# Altium PCB led_RGB_PCB.PcbDoc
Units mil, origin at the board's own origin, x right, y up, seen from the top; angles counter-clockwise.
Board outline 3149.61 x 1377.95 mil, 2 copper layers (Top Layer, Bottom Layer); 35 components, 26 nets, 113 pads, 82 vias.
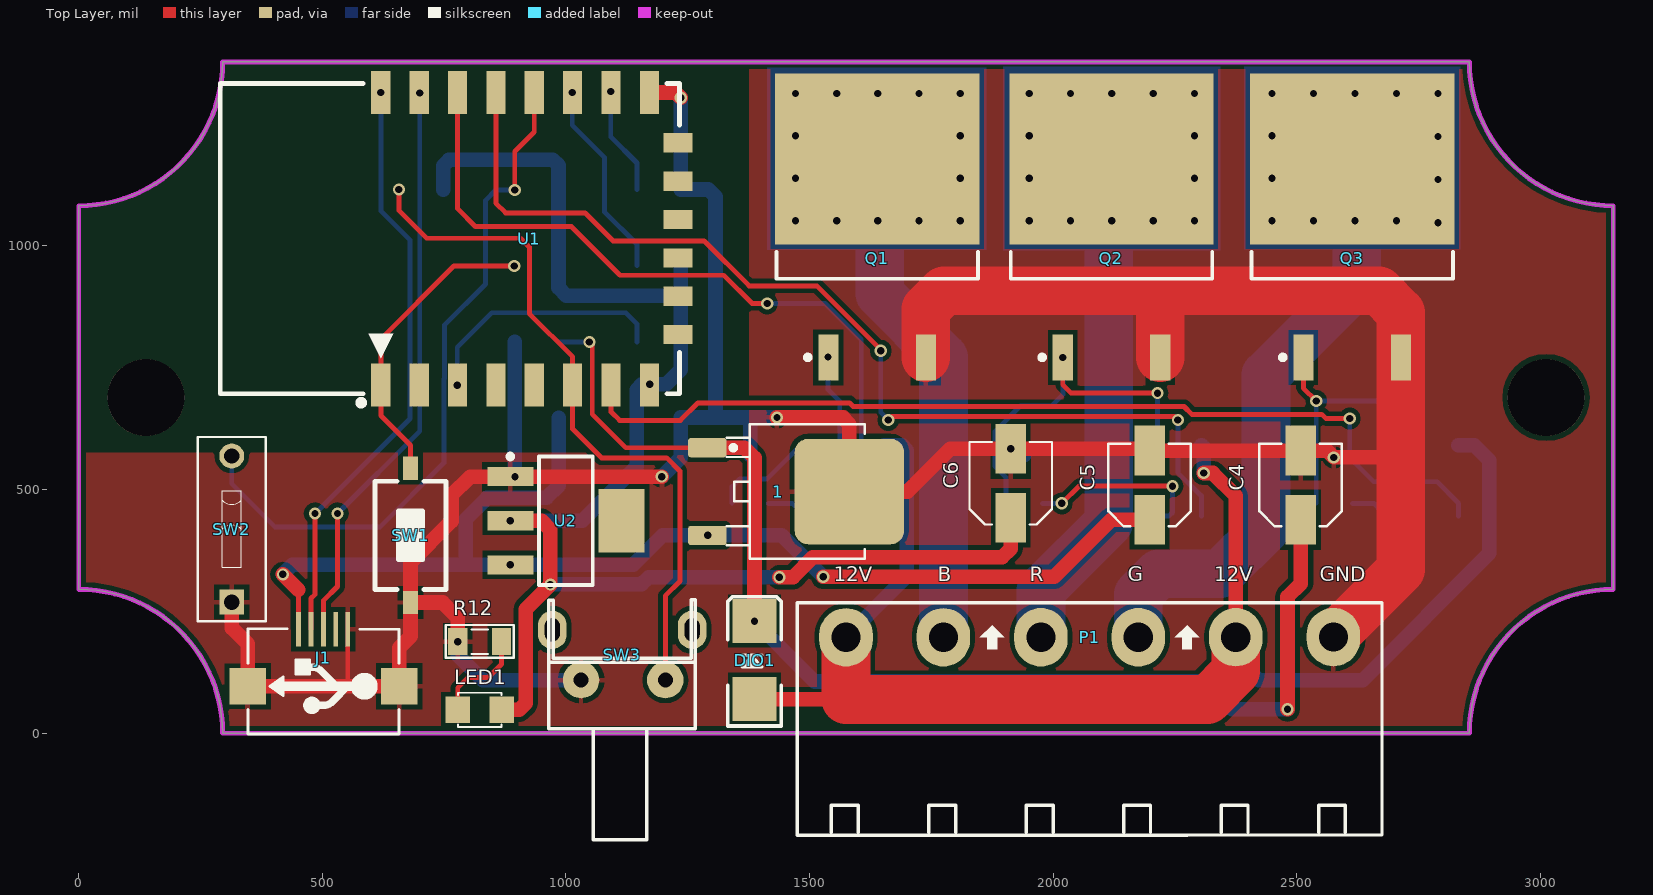
[diagram p0: Top Layer view]
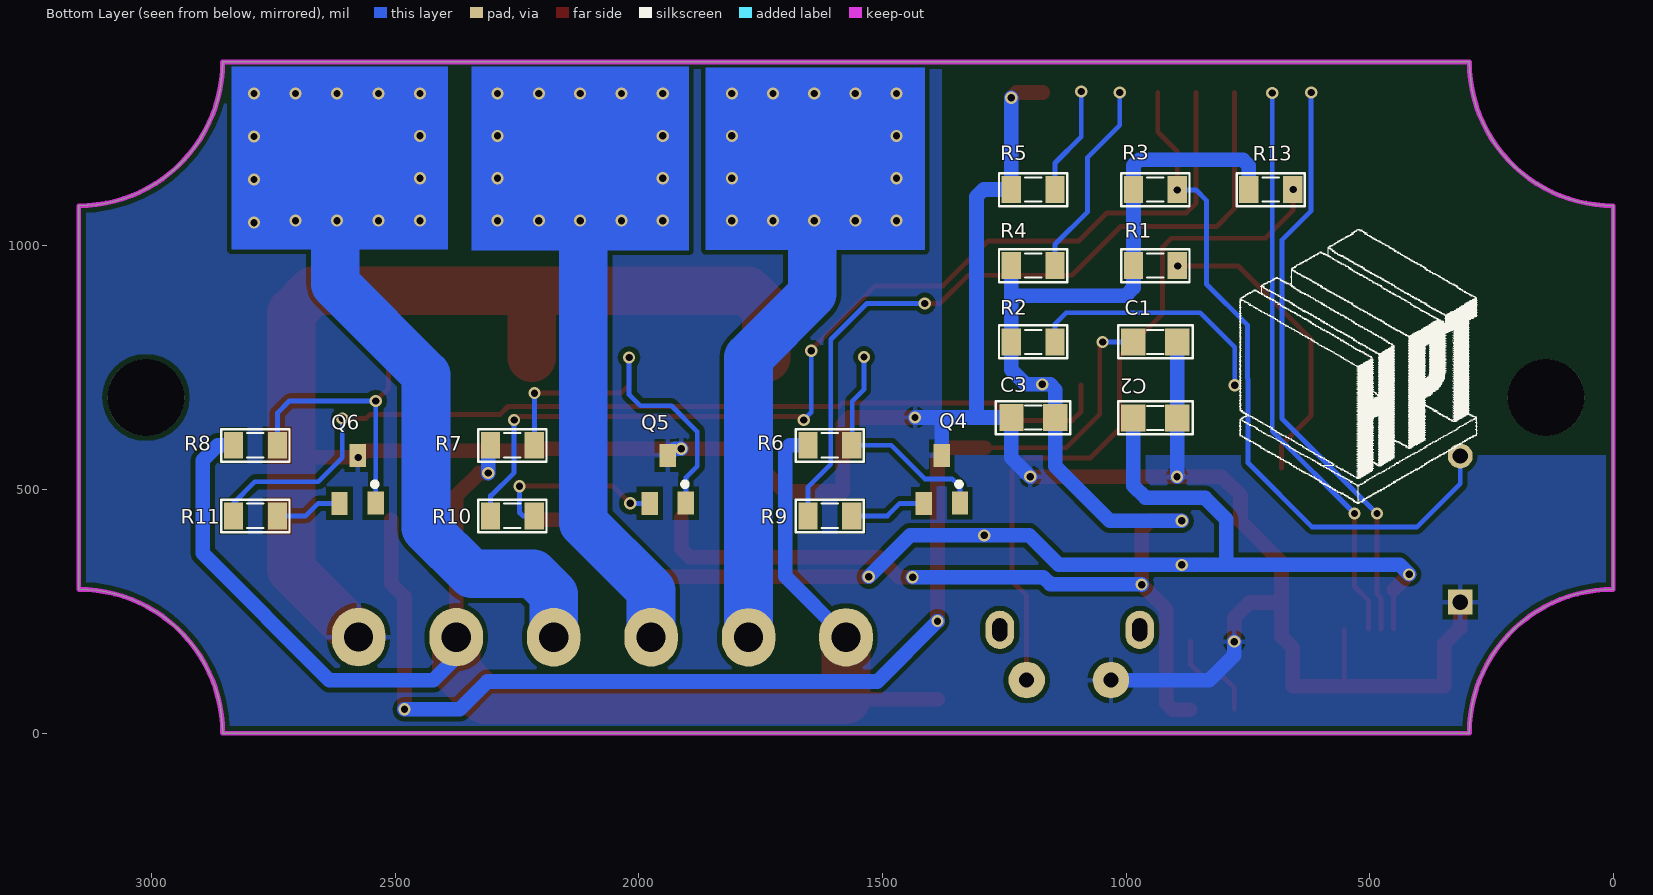
[diagram p1: Bottom Layer view, seen from below]

## Layer stack, top to bottom
Top Solder: solder mask 0.4, Solder Resist, Dk 3.5
Top Layer: signal copper 1.4
Dielectric 1: dielectric 12.6, FR-4, Dk 4.8
Bottom Layer: signal copper 1.4
Bottom Solder: solder mask 0.4, Solder Resist, Dk 3.5

## Board outline
295.27,0 ccw(c0,0) 0,295.28 0,1082.68 ccw(c0,1377.95) 295.27,1377.95 2854.33,1377.95 ccw(c3149.6,1377.95) 3149.6,1082.68 3149.6,295.28 ccw(c3149.6,0) 2854.33,0

## Design rules (kind name [scope] priority, off if disabled: settings)
Clearance [All] p1: gap=10
PolygonConnect [All] p1: connectstyle=Relief reliefconductorwidth=10 reliefentries=4 polygonreliefangle="90 Angle" airgapwidth=10
RoomDefinition led_RGB_schematic [InComponentClass('led_RGB_schematic')] p1: confinementstyle=ConfineIn formatcopy=TRUE lockcomponents=FALSE outline 3356,25 13381,25 13381,1130 3356,1130
RoutingVias [All] p1: holewidth=15 width=25 viastyle="Through Hole" minholewidth=15 minwidth=25 maxholewidth=28 maxwidth=50
SolderMaskExpansion [All] p1: expansion=4
Width Width_1 [InNet('5V')] p1: maxlimit=50 minlimit=10 preferedwidth=50
Width [All] p2: maxlimit=100 minlimit=8 preferedwidth=10
30 further rules are at their usual default settings.

## Components (designator, comment, footprint, x,y, rotation, side; value= is the part's Value field where it differs from the comment)
1 "LM78xx" TO252-123 1436,496 r270 top
C1 "104" SM-CAP-0805 895.22,803 r0 bottom
C2 "104" SM-CAP-0805 895.22,647 r0 bottom
C3 "104" SM-CAP-0805 1235.22,648 r180 bottom
C4 "CN-ALU-SMD" CAP-ALU-SMD-4.5x5x1.4 2508,509 r90 top
C5 "CN-ALU-SMD" CAP-ALU-SMD-4.5x5x1.4 2198,509 r90 top
C6 "CN-ALU-SMD" CAP-ALU-SMD-4.5x5x1.4 1913,513 r90 top
DIO1 "Diode SMD" DIO-SMD-106 1387,150 r270 top
J1 "USB-5" USB-M1 502,213.29 r180 top
LED1 "LED" LED-0805-Blue 868,48 r180 top
P1 "Header 6" HED6T 1574.8,196.85 r0 top
Q1 "IRF540S" D2PAK_N 1638.72,1039 r90 top
Q2 "IRF540S" D2PAK_N 2119.72,1039 r90 top
Q3 "IRF540S" D2PAK_N 2613.72,1039 r90 top
Q4 "A1015" SOT23B 1378,521 r180 bottom
Q5 "A1015" SOT23B 1940.5,521 r180 bottom
Q6 "A1015" SOT23B 2577,521 r180 bottom
R1 "10K" RES-SMD-0805 939.72,960 r180 bottom
R2 "1K" RES-SMD-0805 1190.72,803 r0 bottom
R3 "10K" RES-SMD-0805 939.72,1116 r180 bottom
R4 "10K" RES-SMD-0805 1190.72,960 r180 bottom
R5 "10K" RES-SMD-0805 1190.72,1116 r180 bottom
R6 "10K" RES-SMD-0805 1608,591 r180 bottom
R7 "10K" RES-SMD-0805 2259.5,591 r180 bottom
R8 "10K" RES-SMD-0805 2787,591 r180 bottom
R9 "1K" RES-SMD-0805 1608,446 r180 bottom
R10 "1K" RES-SMD-0805 2259.5,446 r180 bottom
R11 "1K" RES-SMD-0805 2787,446 r180 bottom
R12 "4K7" RES-SMD-0805 823,188 r180 top
R13 "Res" RES-SMD-0805 703,1116 r180 bottom
SW1 "SW" SW1-SMD 681,406 r90 top
SW2 "SW" SW-DIP1-1 314,419 r0 top
SW3 "SW" SW2-D2 1115,109 r0 top
U1 "ESP_12_E" ESP_12_E 620,700 r90 top
U2 "LM1117-3.3V" SOT223 1000,436 r270 top

## Footprints (in the part's own frame and the unit in brackets; to place one, negate y for a bottom-side part, rotate by r counter-clockwise, add the part's x,y. Pads: shape width x height; smd on the part's side, far side on the other; paste and mask are expansions set on the pad)
CAP-ALU-SMD-4.5x5x1.4 [mm]
  rect 2.6x1.6 smd: 1(-1.8,0) 2(1.8,0)
  silkscreen extent -2.15,-2.15 2.15,2.15, body extent -2.5,-2.15 2.5,2.15, height 5.45
D2PAK_N [mm] "D2-PAK, 4-Leads, Body 8.8x10.4mm, Pitch 2.54mm, Lead Span 15.1mm, IPC Medium Density"
  rect 2.4x1.05 smd: 1(-6.8,2.54) 3(-6.8,-2.54)
  rect 8.9x10.65 smd: 2(3.55,0)
  silkscreen extent -6.92,-5.25 -1.3,5.25, body extent -2.7,-5.28 6.3,5.28, height 4.69
DIO-SMD-106 [mil]
  rect 90x90.55 smd: 1(80,0) 2(-80,0)
  silkscreen extent -130,-55 135,55, body extent -99,-50 106,52, height 95
ESP_12_E [mm] "ESP-12 Wi-Fi Module by AI-Thinker"
  rect 2.25x1 smd: 1(0.375,0) 2(0.375,-2) 3(0.375,-4) 4(0.375,-6) 5(0.375,-8) 6(0.375,-10) 7(0.375,-12) 8(0.375,-14) 15(15.625,-14) 16(15.625,-12) 17(15.625,-10) 18(15.625,-8) 19(15.625,-6) 20(15.625,-4) 21(15.625,-2) 22(15.625,0)
  rect 1x1.5 smd: 9(3,-15.5) 10(5,-15.5) 11(7,-15.5) 12(9,-15.5) 13(11,-15.5) 14(13,-15.5)
  silkscreen extent -0.7,-15.57 16.08,8.37, body extent 0,-15.49 16,8.51, height 2.75
HED6T [mil] "Header 4, 4 pin, hight 300mil, Pin to Pin 200, Colour Green"
  oval 110x120 hole 60: 1(0,0) 2(200,0) 3(400.06,0.06) 4(600.06,0.06) 5(800.12,0.12) 6(1000.46,0.46)
  silkscreen extent -100,-406 1100,71, body extent -100,-406 1094,66, height 334
LED-0805-Blue [mil]
  rect 50x55 smd: 1(0,0) 2(90,0)
  silkscreen extent 0,-35 90,35, body extent 5,-25 85,25, height 43
RES-SMD-0805 [mil]
  rect 39.37x55 smd: 1(-45,0) 2(45,0)
  silkscreen extent -70,-34 70,33, body extent -39,-25 39,25, height 31
SM-CAP-0805 [mil]
  rect 50x55 smd: 1(0,0) 2(90,0)
  silkscreen extent -32,-34 121,33, body extent 6,-25 84,25, height 31
SOT23B [mm] "SOT 23B"
  rect 0.85x1.2 smd: 1(0.94,-1.245) 2(0,1.25) 3(-0.95,-1.25)
  silkscreen extent 0.77,-0.38 1.02,-0.13, body extent -1.5,-1.3 1.5,1.2, height 1.06
SOT223 [mm]
  rect 1x2.4 smd: 1(-2.3,-2.9) 2(0,-2.9) 3(2.3,-2.9)
  rect 3.3x2.4 smd: 4(0,2.9)
  silkscreen extent -3.47,-3.02 3.35,1.4, body extent -3.25,-3.56 3.25,3.4, height 1.68
SW1-SMD [mm]
  rect 1.2x0.8 smd: 1(-3.5,0) 2(3.5,0)
  silkscreen extent -2.82,-1.85 2.82,1.85, body extent -3.05,-1.85 3.05,1.85, height 2.5
SW2-D2 [mil] "SW button 2pin, 300x 300 x 250 mil"
  round 75 hole 31: 1(-84,0) 2(89,0)
  oval 59.06x78.74 hole 31 slot 47.24 at 90 deg: G1(-143,103) G2(144,103)
  silkscreen extent -150,-328 150,165, body extent -163,-327 167,163, height 290
SW-DIP1-1 [mm] "01p, 2.54mm Pitch, Horizontal, Box Type, THT, flat Actuator, red, without Tape, Tube"
  rect 1.3x1.3 hole 0.8: 1(0,-3.81)
  round 1.3 hole 0.8: 2(0,3.81)
  silkscreen extent -1.77,-4.8 1.77,4.8, body extent -1.77,-4.8 1.77,4.8, height 5.4
TO252-123 [mm]
  round 0.5 on Mech15: 0(0,0)
  rrect25% 1x2 smd: 1(-2.285,-3.7) 3(2.285,-3.7)
  rrect25% 5.5x5.7 smd: 2(0,3.7)
  silkscreen extent -3.5,-2.7 3.5,4.5, body extent -3.3,-3.95 3.3,5.76, height 2.31
USB-M1 [mil]
  rect 10x70 smd: 1(51.18,0) 2(25.59,0) 3(0,0) 4(-25.59,0) 5(-50,0)
  rect 74.8x74.8 smd: 5(-155.51,116.84) 5(155.51,116.84)
  silkscreen extent -155,-1 155,215, body extent -157,5 158,218, height 107

## Part data
1: "Positive Voltage Regulator"
C1 C2 C3: library part CN
C4 C5 C6: "Polarized Capacitor (Axial)"
DIO1: "Default Diode"
LED1: library part "LED SMD"
P1: "Header, 6-Pin"
Q1 Q2 Q3: "HEXFET N-Channel Power MOSFET"
Q4 Q5 Q6: "PNP 600mW, ECB"
R1 R2 R3 R4 R5 R6 R7 R8 R9 R10 R11 R12 R13: library part Res-SMD, "Resistor"
SW1 SW2 SW3: library part SW2, "Switch button 2 pin"
U1: "ESP-12 Wi-Fi Module by AI-Thinker"
U2: library part LM1117, "800mA Low-Dropout Linear Regulator"

## Free pads (board coordinates)
  round 157.48 hole 157.48: 40(137.8,688.98) 41(3011.81,688.98)

## Via types
v1: diameter 25, hole 15, Top Layer to Bottom Layer, tented both sides, 82 vias

## Nets (pads, with @x,y where several pads share a name; then routed paths per layer and width w, separated by ;. In a path a pad name is that pad's centre, name@x,y a point inside that pad or via, vN(x,y) a via of type N, cw(c..) or ccw(c..) an arc to the next point about the centre after c; other vN are vias at no path point)
3.3V: C3.2 C6.1 LED1.1 R1.1 R2.2 R3.1 R4.1 R13.1 U1.8 U2.2 | length 3150.6
  Top Layer w30: LED1.1 904,48 917.47,61.47 917.47,254.47 v1(967.95,304.95) ; v1(885.83,436) 950,436 968,418 v1@968,305 ; v1(1438,320) 1466,320 1507,361 1895,361 1913,379 C6.1
  Bottom Layer w30: R13.1 748,1165 760,1177 973,1177 984.72,1165.28 R3.1 R1.1 984.72,914.28 1001,898 1235.72,898 ; v1(885.83,436) 1033,436 1145.22,548.22 C3.2 1145.22,705.22 1156,716 v1(1172,716) 1206,716 1235.72,745.72 R2.2 1235.72,898 ; v1(967.95,304.95) 967.45,305.45 1155.02,305.45 1169.57,320 v1(1438,320) ; R4.1 1235.72,898
5V: 1.3 C2.2 C5.1 J1.1 U2.3 | length 2474
  Top Layer w10: J1.1 450.82,294.18
  Top Layer w30: v1(419,326) 450.82,294.18 ; v1(1528,321) 2002,321 2119.13,438.13 C5.1
  Bottom Layer w30: v1(419,326) 438.45,345.45 794,345.45 ; C2.2 985.22,508.22 960,483 838,483 794,439 794,345.45 ; v1(1528,321) 1443,406 v1(1291,406) 1199,406 1138.45,345.45 v1(885.83,345.45) 794,345.45
12V: DIO1.1 P1.1 P1.5 R6.1 R7.1 R8.1 | length 3086.4
  Top Layer w30: DIO1.1 1573.8,70 1574.8,69 ; v1(2309,534) 2328,534 2374.93,487.07 P1.5
  Top Layer w100: P1.1 1574.8,69 2317,69 2374.93,126.93 P1.5
  Bottom Layer w30: P1.1 1699.8,321.85 1699.8,581 1689.8,591 R6.1 ; R7.1 2309,586.5 v1(2309,534) ; P1.5 2374.93,156.07 2422,109 2635,109 2895,369 2895,560 2864,591 R8.1
CONFIG: R13.2 SW3.2 U1.6 | length 1450
  Top Layer w10: v1(657,1116) 657,1073 714,1016 907,1016 925,998 925,861 1013.7,772.3 U1.6 1013.7,624.3 1073,565 1207,565 1234,538 1234,312 1204,282 SW3.2
GND: 1.2 C1.1 C2.1 C3.1 C4.2 C5.2 C6.2 J1.5 P1.6 Q1.3 Q2.3 Q3.3 Q4.2 Q5.2 Q6.2 R5.1 R12.2 SW1.1 SW2.1 SW3.1 U1.15 U2.1 | length 6907.2
  Top Layer w10: 552,96.45 J1.5@552,213.29
  Top Layer w30: SW2.1 314,216 346.49,183.51 346.49,96.45 552,96.45 657.51,96.45 657.51,175.51 681,199 SW1.1 ; v1(778,188) 778,237 746.8,268.2 SW1.1 ; U1.15 1224.84,1315.16 v1(1235.72,1304.28) ; v1(1196.45,526.55) U2.1 803.55,526.55 765,488 765,435 681,351 SW1.1 ; v1(1433,648) 1568,648 1581.67,634.33 1.2 1701,496 1788.87,583.87 v1(1913,583.87) C5.2@2194,583.87 ; C5.2 2198.13,580 2507.87,580 C4.2 2562.13,579.87 v1(2576,566) 2710.72,566 2713.72,569
  Top Layer w100: Q1.3 1738.72,870.72 1776,908 2210,908 ; Q2.3 2219.72,898.28 2210,908 ; P1.6 2713.72,335.77 2713.72,569 Q3.3 2713.72,863.28 2669,908 2210,908
  Bottom Layer w30: v1(778,188) 778,160 829,109 SW3.1 ; v1(895.22,526.22) C2.1 C1.1 ; v1(1196.45,526.55) 1235.22,565.32 C3.1 1310,648 ; v1(1235.72,1304.28) R5.1 1292,1116 1307,1101 1307,651 1310,648 ; Q4.2 1378,648 ; v1(1433,648) 1378,648 ; v1(1913,583.87) 1926.85,583.87 Q5.2 ; 1310,648 1378,648
LEDB: R9.1 U1.20 | length 1559.9
  Top Layer w10: U1.20 777.48,1076.52 814,1040 1011,1040 1111,940 1324,940 1382,882 v1(1413,882)
  Bottom Layer w10: v1(1413,882) 1532,882 1606,808 1606,552 1653,505 R9.1
LEDG: R11.1 U1.7 | length 1975.4
  Top Layer w10: U1.7 1092.44,659.56 1110,642 1235,642 1271,678 1582,678 1589.5,670.5 2268.5,670.5 2284.5,654.5 2551.39,654.5 2560.16,645.73 v1(2608.73,645.73)
  Bottom Layer w10: v1(2608.73,645.73) 2608.73,565.27 2658,516 2788,516 2832,472 R11.1
LEDR: R10.1 U1.19 | length 2109.7
  Top Layer w10: U1.19 856.22,1087.78 876,1068 1039,1068 1096.72,1010.28 1283.72,1010.28 1376,918 1515,918 v1@1647,786 ; v1(1661.5,643) 1668.55,650.05 2248.95,650.05 v1(2256,643)
  Bottom Layer w10: v1(1646,785) 1646,658.5 v1(1661.5,643) ; v1(2256,643) 2256,534.89 2303.39,487.5 2304.5,487.5 R10.1
Net1_1: 1.1 C1.2 C4.1 DIO1.2 | length 2487.8
  Top Layer w10: v1(1048,803) 1054,797 1054,655 1123.04,585.96 1.1
  Top Layer w30: 1.1 1366.04,585.96 1387,565 v1(1387,230) ; v1(2481,49) 2481,280 2508,307 C4.1
  Bottom Layer w10: C1.2 v1(1048,803)
  Bottom Layer w30: v1(1387,230) 1511,106 2311,106 2368,49 v1(2481,49)
NetLED1_2: LED1.2 R12.1 | length 201.3
  Top Layer w10: LED1.2 778,93 799,114 840,114 868,142 R12.1
NetP1_2: P1.2 Q1.2 | length 1089.5
  Bottom Layer w100: 1634,1228 1644,1218 1644,902 1774.8,771.2 P1.2
  other v1: 1471,1052 1555.5,1052 1640,1052 1724.5,1052 1809,1052 1471,1139 1809,1139 1471,1226 1809,1226 1471,1313 1555.5,1313 1640,1313 1724.5,1313 1809,1313
NetP1_3: P1.3 Q2.2 | length 1064.7
  Bottom Layer w100: P1.3 1974.87,292.87 2114,432 2114,1204
  other v1: 1951,1052 2035.75,1052 2120.5,1052 2205.25,1052 2290,1052 1951,1139 2290,1139 1951,1226 2290,1226 1951,1313 2035.75,1313 2120.5,1313 2205.25,1313 2290,1313
NetP1_4: P1.4 Q3.2 | length 1266.5
  Bottom Layer w100: P1.4 2174.87,284.87 2217,327 2343,327 2437,421 2437,736 2623,922 2623,1204
  other v1: 2790,1048 2449,1052 2534.25,1052 2619.5,1052 2704.75,1052 2790,1136.33 2449,1139 2790,1224.67 2449,1226 2449,1313 2534.25,1313 2619.5,1313 2704.75,1313 2790,1313
NetQ1_1: Q1.1 Q4.1 R6.2 | length 482.6
  Bottom Layer w10: Q4.1 1341,506 1357,522 1413,522 1482,591 R6.2 1562,592 1562,681 1538,705 v1(1538,772)
NetQ2_1: Q2.1 Q5.1 R7.2 | length 768.9
  Top Layer w10: Q2.1 2019.72,715.28 2037,698 v1(2214,698)
  Bottom Layer w10: Q5.1 1903.5,524.5 1880,548 1880,619 1933,672 1997,672 2020,695 v1(2020,771) ; v1(2214,698) 2214,591.5 R7.2
NetQ3_1: Q3.1 Q6.1 R8.2 | length 588.5
  Top Layer w10: Q3.1 2513.72,708.28 v1(2540,682)
  Bottom Layer w10: Q6.1 v1(2540,682) 2717,682 2742,657 R8.2
NetQ4_3: Q4.3 R9.2 | length 158.3
  Bottom Layer w10: Q4.3 1464.21,471.79 1490,446 R9.2
NetQ5_3: Q5.3 R10.2 | length 369.9
  Top Layer w10: v1(2017.79,471.79) 2054,508 2055,507 v1(2245,507)
  Bottom Layer w10: Q5.3 v1(2017.79,471.79) ; R10.2 2238,446 2245,453 v1(2245,507)
NetQ6_3: Q6.3 R11.2 | length 138.3
  Bottom Layer w10: Q6.3 2658.21,471.79 2684,446 R11.2
NetR1_2: R1.2 SW1.2 U1.1 | length 626.3
  Top Layer w10: SW1.2 681,591 620,652 U1.1 620,809 770,959 v1(893.72,959)
NetR2_1: R2.1 U1.3 | length 522.8
  Bottom Layer w10: v1(777,714) 777,792 848,863 1123,863 1145.72,840.28 R2.1
NetR3_2: R3.2 SW2.2 U1.18 | length 1444.2
  Top Layer w10: v1(895,1115) 895,1194 934.96,1233.96 U1.18
  Bottom Layer w10: SW2.2 314,512 403,423 618,423 749.5,554.5 749.5,726.89 751,728.39 751,838 835,922 835,1094 856,1115 v1(895,1115)
NetR4_2: R4.2 U1.17 | length 410
  Bottom Layer w10: v1(1013,1315) 1013,1248 1079,1182 1079,1070 1145.72,1003.28 R4.2
NetR5_2: R5.2 U1.16 | length 223.3
  Bottom Layer w10: v1(1092,1317) 1092,1224 1145.72,1170.28 R5.2
RX: J1.2 U1.22 | length 1210.9
  Top Layer w10: J1.2 476.41,276.41 485,285 v1(485,451)
  Bottom Layer w10: v1(485,451) 680,646 680,1012 620,1072 v1(620,1315)
TX: J1.3 U1.21 | length 1182.6
  Top Layer w10: J1.3 502,272 531,301 v1(531,451)
  Bottom Layer w10: v1(531,451) 700,620 v1(700,1313.9)
pads on no net: 1.0 J1.4 SW3.G1 SW3.G2 U1.2 U1.4 U1.5 U1.9 U1.10 U1.11 U1.12 U1.13 U1.14 U2.4

## Polygon pours and split planes (outlines as drawn)
GND on Top Layer "Bottom Layer-No Net" (solid, remove dead copper, pour order 8): 0,295.28 0,575.48 1376.52,575.48 1376.52,1377.95 2854.33,1377.95 3149.6,1377.95 3149.6,295.28 3149.6,0 295.27,0
GND on Bottom Layer "Bottom Layer-No Net" (solid, remove dead copper, pour order 10): 0,295.28 0,570.21 1378,570.21 1378,1377.95 2854.33,1377.95 3149.6,1377.95 3149.6,296 3149.6,0 295.27,0

## Keep-outs
Keep-Out Layer:
  the board outline again, w10

## Other copper
Bottom Layer:
  rectangle net NetP1_4: 2392,993 2836,1368
  rectangle net NetP1_3: 1897,991 2343,1368
  rectangle net NetP1_2: 1413,992 1863,1366

## Silkscreen, mask and mechanical layers (free items; w line width, h text height)
Top Overlay:
  text "12V" at 1550,312 h30
  text "B" at 1763,312 h30
  text "R" at 1952,312 h30
  text "G" at 2153,312 h30
  text "12V" at 2331,312 h30
  text "GND" at 2547,312 h30
Bottom Overlay:
  drawing of 2330 lines, arcs and shapes, not listed

## Text inside footprints (layer, text, board x,y; h text height)
U1: Mechanical 13 "CUTOUT POLYGON" at 330,705 h10 r90; Mechanical 13 "ANTENNA AREA" at 310,705 h10 r90